# EAGLE board Thermostat (EAGLE 9.2.1)
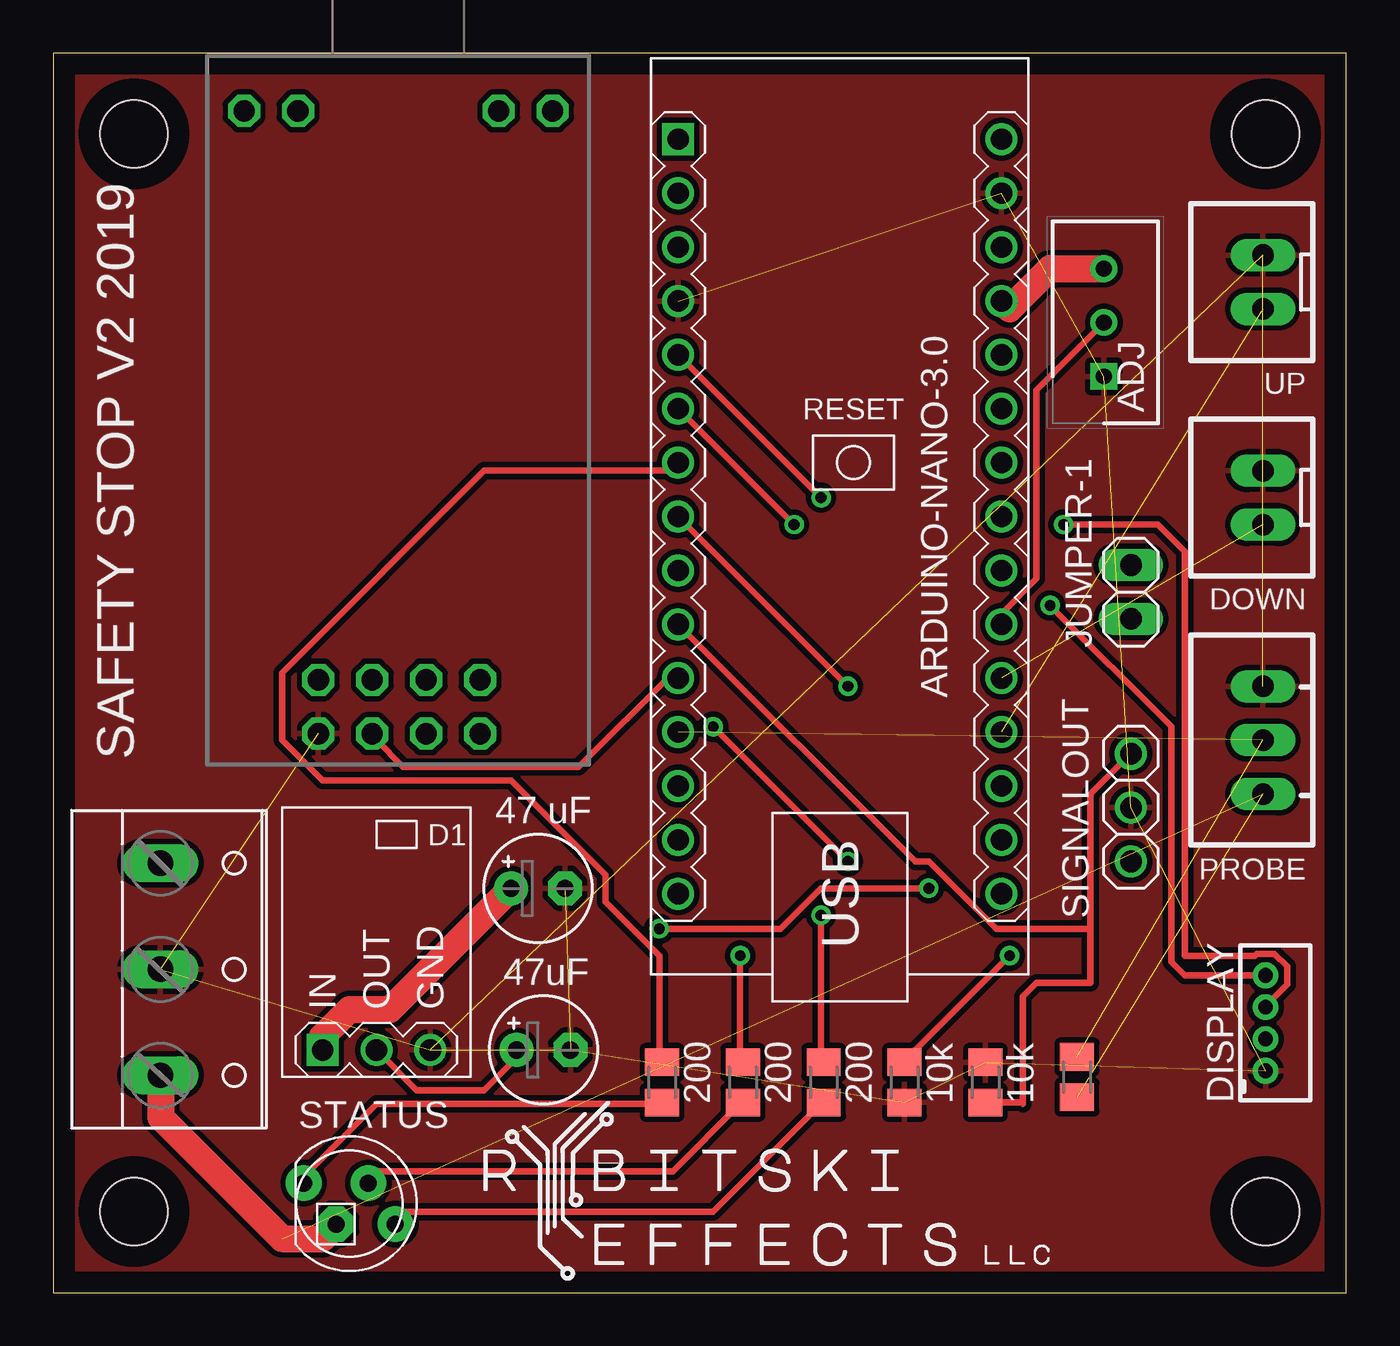
[diagram p0: board, top side]
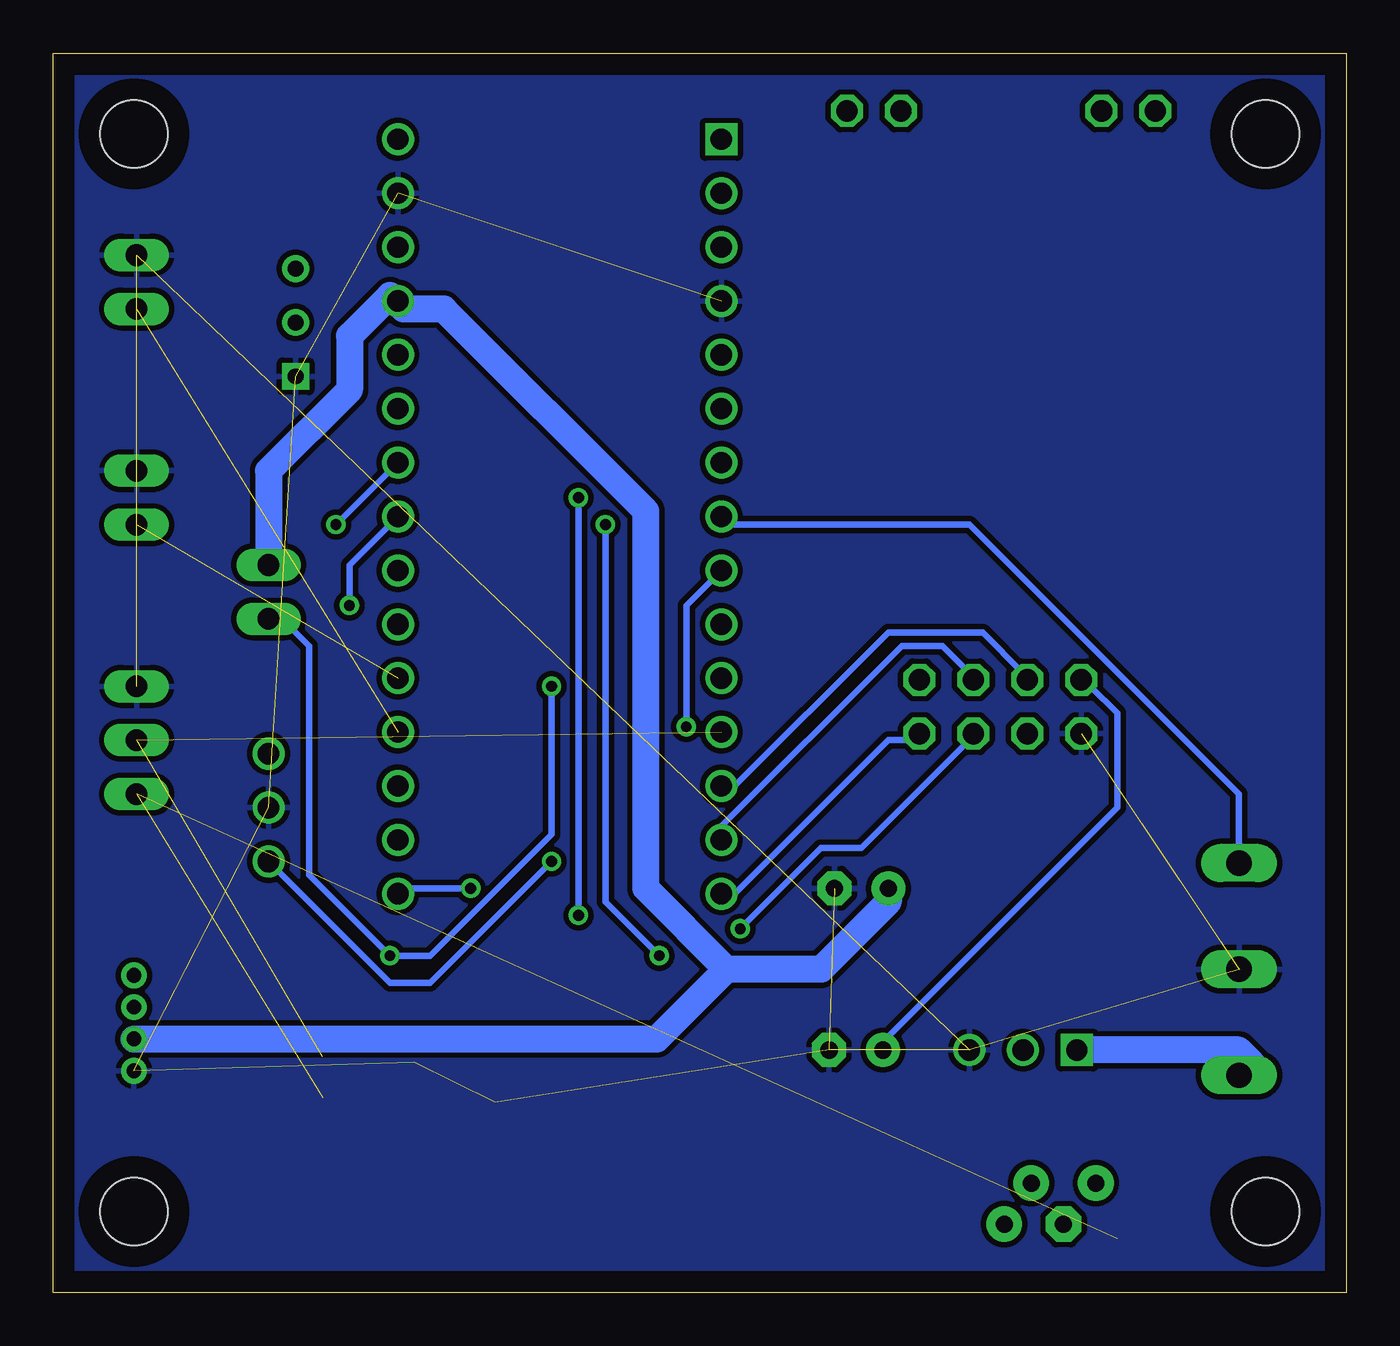
[diagram p1: board, bottom side, seen from below]

Size 60.96 x 58.42 mm. Coordinates in mm from the lower left corner, seen from the top.
Outline: 0,0 60.96,0 60.96,58.42 0,58.42 0,0
Copper layers (1*16): Top 0.035mm / dielectric 1.5mm / Bottom 0.035mm
Design rules "default": minimum track width 6mil, minimum drill 0.35mm, track to track 6mil, track to pad 6mil, pad to pad 6mil, via to via 6mil, smd to smd 6mil, copper to edge 40mil, drill to drill 6mil, minimum pad ring 10mil, minimum via ring 8mil, stop-mask expansion 4mil, vias tented up to drill 0mil, thermal gap 10mil
Net classes: 0 default: width 0.305 mm, drill 0.508 mm, clearance 0.254 mm; 1 Power: width 1.27 mm, drill 0.508 mm, clearance 0.381 mm
Holes 3.17 mm at 3.81,54.61 3.81,3.81 57.15,54.61 57.15,3.81

## Footprints (pad centres in the part's own frame; a part is rotated, then mirrored left to right if it is on the bottom)
SHDR3W54P0X254_1X3_953X483X115 = drill 0.75 pad 1.15 square: 1 0,0 | drill 0.75 pad 1.15: 2 -2.54,0; 3 -5.08,0
E2,5-5 = drill 0.813 pad 1.6: + -1.27,0 | drill 0.813 pad 1.6 octagon: - 1.27,0
B4B-ZR = drill 0.7 pad 1.1: 1 -2.25,0; 2 -0.75,0; 3 0.75,0; 4 2.25,0
JST-XH-02-PACKAGE-LONG-PAD = drill 1.016 long: 1 -1.27,0; 2 1.27,0
1X02 = drill 1.016 long: 1 -1.27,0; 2 1.27,0
ARDUINO-NANO-3.0 = drill 1 square: J1.1 17.78,7.62 | drill 1: J1.2 15.24,7.62; J1.3 12.7,7.62; J1.4 10.16,7.62; J1.5 7.62,7.62; J1.6 5.08,7.62; J1.7 2.54,7.62; J1.8 0,7.62; J1.9 -2.54,7.62; J1.10 -5.08,7.62; J1.11 -7.62,7.62; J1.12 -10.16,7.62; J1.13 -12.7,7.62; J1.14 -15.24,7.62; J1.15 -17.78,7.62; J2.1 17.78,-7.62; J2.2 15.24,-7.62; J2.3 12.7,-7.62; J2.4 10.16,-7.62; J2.5 7.62,-7.62; J2.6 5.08,-7.62; J2.7 2.54,-7.62; J2.8 0,-7.62; J2.9 -2.54,-7.62; J2.10 -5.08,-7.62; J2.11 -7.62,-7.62; J2.12 -10.16,-7.62; J2.13 -12.7,-7.62; J2.14 -15.24,-7.62; J2.15 -17.78,-7.62
JST-XH-03-PACKAGE-LONG-PAD = drill 1.016 long: 1 -2.54,0; 2 0,0; 3 2.54,0
M0805 = smd 1.3 x 1.6: 1 -0.95,0; 2 0.95,0
1X03 = drill 1.016: 1 -2.54,0; 2 0,0; 3 2.54,0
LED5MMRGB = drill 0.8 pad 1.676: 1 -2.159,0.968; 3 0.889,0.968; 4 2.159,-0.968 | drill 0.8 pad 1.676 octagon: 2 -0.635,-0.968
E01-ML01DP5 = drill 1 octagon: CE 10.23,-1.45; CSN 10.23,-3.99; GND 12.77,-1.45; IRQ 5.15,-3.99; MISO 5.15,-1.45; MOSI 7.69,-3.99; P$9 1.73,-30.8; P$10 4.27,-30.8; P$11 13.73,-30.8; P$12 16.27,-30.8; SCK 7.69,-1.45; VCC 12.77,-3.99
REG-AMS1117-3P = drill 1 square: 1 -2.54,-5.08 | drill 1: 2 0,-5.08; 3 2.54,-5.08
W237-103 = drill 1.194 long: 1 -5,-1.29; 2 0,-1.29; 3 5,-1.29

## Placement (x,y rotation side)
ADJ  3296W-1-103LF  [SHDR3W54P0X254_1X3_953X483X115]  49.53,43.18 270 top
C1  47 uF  [E2,5-5]  22.86,19.05 0 top
C2  47uF  [E2,5-5]  23.11,11.43 0 top
DISPLAY  B4B-ZR  [B4B-ZR]  57.15,12.7 90 top
DOWN  JST-XH-02-PIN-LONG-PAD  [JST-XH-02-PACKAGE-LONG-PAD]  57.02,37.47 90 top
JUMPER-1  [1X02]  50.8,33.02 90 top
M2  ARDUINO-NANO-3.0  [ARDUINO-NANO-3.0]  37.08,36.58 90 top
PROBE  JST-XH-03-PIN-LONG-PAD  [JST-XH-03-PACKAGE-LONG-PAD]  57.02,26.04 90 top
R1  200  [M0805]  36.32,9.91 90 top
R2  200  [M0805]  32.51,9.91 90 top
R3  200  [M0805]  28.7,9.91 90 top
R4  10k  [M0805]  40.13,9.91 90 top
R5  4.7K  [M0805]  48.26,10.16 90 top
R8  10k  [M0805]  43.94,9.91 90 top
SIGNALOUT  [1X03]  50.8,22.86 270 top
STATUS  RGBLED_CA-5MM  [LED5MMRGB]  13.97,4.19 0 top
U$1  E01-ML01DP5  [E01-ML01DP5]  25.27,24.89 180 top
U$2  REG-AMS1117-3P-3.3V  [REG-AMS1117-3P]  15.24,16.51 0 top
UP  JST-XH-02-PIN-LONG-PAD  [JST-XH-02-PACKAGE-LONG-PAD]  57.02,47.62 90 top
X1  [W237-103]  6.35,15.24 270 top

## Library data of the parts
ADJ = 3296W-1-103LF; DESCRIPTION: Bourns 3296W Series 25-Turn Through Hole Cermet Trimmer Resistor with Pin Terminations, 10000???? ????10% 1/2W ????100ppm/????C; HEIGHT: 11.55mm; MANUFACTURER_NAME: Bourns; MANUFACTURER_PART_NUMBER: 3296W-1-103LF; MOUSER_PART_NUMBER: 652-3296W-1-103LF; MOUSER_PRICE-STOCK: https://www.mouser.com/Search/Refine.aspx?Keyword=652-3296W-1-103LF
C1 C2 = rcl; SPICEPREFIX: C
DISPLAY = con-jst; MF: FARNELL; MPN: B4B-ZR(LF)(SN); OC_FARNELL: 1830916; OC_NEWARK: 37K9960
DOWN PROBE UP = Rembrandt Electronics - JST XH Connectors v1-0
JUMPER-1 = pinhead
M2 U$2 = diy-modules
R1-R5 R8 SIGNALOUT STATUS = adafruit
U$1 = MyLibrary
X1 = con-wago-500; MPN: 237-103; OC_FARNELL: unknown; OC_NEWARK: 18M7116

## Nets
3V3: M2.J2.14
+5V [Power]: ADJ.3 C1.+ DISPLAY.2 JUMPER-1.2 M2.J2.4 PROBE.1 R5.1 STATUS.2 U$2.1 X1.3
GND: ADJ.1 C1.- C2.- DISPLAY.1 DOWN.2 M2.J1.4 M2.J2.2 PROBE.3 R4.1 R8.2 SIGNALOUT.2 U$1.GND U$2.3 UP.2 X1.2
N$6: M2.J1.6 R2.2
N$7: C2.+ U$1.VCC U$2.2
N$8: R1.1 STATUS.4
N$9: R2.1 STATUS.3
N$10: R3.1 STATUS.1
N$11: M2.J1.5 R1.2
N$12: M2.J1.7 R3.2
N$13: ADJ.2 M2.J2.10
N-A0: M2.J2.12 UP.1
N-A1: DOWN.1 M2.J2.11
N-A4: DISPLAY.4 M2.J2.8
N-A5: DISPLAY.3 M2.J2.7
N-D5: JUMPER-1.1 M2.J1.8 R4.2 X1.1
N-D6: M2.J1.9 SIGNALOUT.3
N-D7: M2.J1.10 R8.1 SIGNALOUT.1
N-D8: M2.J1.11 U$1.CE
N-D9: M2.J1.12 PROBE.2 R5.2
N-D10: M2.J1.13 U$1.CSN
N-D11: M2.J1.14 U$1.MOSI
N-D12: M2.J1.15 U$1.MISO
N-D13: M2.J2.15 U$1.SCK
VIN: M2.J2.1

## Tracks (layer width: path | path; a pad name or v marks a point on that pad's centre or on a via)
+5V  (2 unrouted)
  Top 1.27: ADJ.3 46.99,48.26 45.09,46.35 M2.J2.4 | C1.+ 15.88,13.34 13.97,13.34 12.7,12.06 U$2.1 | STATUS.2 13.34,3.17 12.7,2.54 10.79,2.54 5.08,8.26 5.08,10.16 X1.3
  Bottom 1.27: JUMPER-1.2 50.8,38.73 46.99,42.55 46.99,45.09 45.09,46.99 M2.J2.4 44.45,46.35 42.55,46.35 33.02,36.83 33.02,19.05 29.21,15.24 | U$2.1 5.08,11.43 4.45,10.79 X1.3 | 29.21,15.24 24.77,15.24 21.59,18.41 C1.+ | DISPLAY.2 32.5,11.95 29.21,15.24
GND  (14 unrouted)
  pour Top: 0,59.69 0,0 1.27,-1.27 63.5,-1.27 64.77,0 64.77,58.42 1.27,58.42
  pour Bottom: -1.27,59.69 -1.27,1.27 1.27,-1.27 63.5,-1.27 63.5,59.69
N$6  (via drill 0.51)
  Top 0.305: v32.38,15.88 32.38,11.43 R2.2 | M2.J1.6 v34.92,36.2
  Bottom 0.305: v32.38,15.88 34.92,18.41 v34.92,36.2
N$7
  Top 0.305: U$2.2 17.14,9.53 20.32,9.53 22.23,11.43 C2.+
  Bottom 0.305: U$1.VCC 12.06,28.57 10.79,27.3 10.79,22.86 22.23,11.43 C2.+
N$8
  Top 0.305: R1.1 36.2,8.89 31.11,3.81 16.51,3.81 STATUS.4
N$9
  Top 0.305: R2.1 32.38,8.89 29.21,5.71 15.24,5.71 STATUS.3
N$10
  Top 0.305: R3.1 28.57,8.89 15.24,8.89 12.06,5.71 STATUS.1
N$11  (via drill 0.51)
  Top 0.305: v36.2,17.78 36.2,11.43 R1.2 | M2.J1.5 v36.2,37.47
  Bottom 0.305: v36.2,37.47 v36.2,17.78
N$12
  Top 0.305: R3.2 28.57,11.43 28.57,15.88 26.04,18.41 26.04,19.68 21.59,24.13 12.7,24.13 10.79,26.04 10.79,29.21 20.32,38.73 29.21,38.73 M2.J1.7
N$13
  Top 0.305: ADJ.2 46.35,42.55 46.35,33.66 44.45,31.75 M2.J2.10
N-A0  (1 unrouted)
N-A1  (1 unrouted)
N-A4  (via drill 0.51)
  Top 0.305: DISPLAY.4 53.34,14.95 52.7,15.59 52.7,26.67 v46.99,32.38
  Bottom 0.305: v46.99,32.38 46.99,34.29 M2.J2.8
N-A5  (via drill 0.51)
  Top 0.305: v47.62,36.2 52.07,36.2 53.34,34.92 53.34,15.88 56.65,15.88 56.73,15.96 57.57,15.96 58.16,15.37 58.16,14.53 57.15,13.52 DISPLAY.3
  Bottom 0.305: M2.J2.7 v47.62,36.2
N-D5  (via drill 0.51)
  Top 0.305: v45.09,15.88 40.64,11.43 R4.2 | M2.J1.8 v37.47,28.57
  Bottom 0.305: JUMPER-1.1 50.16,31.75 48.9,30.48 48.9,19.68 v45.09,15.88 43.18,15.88 37.47,21.59 v37.47,28.57 | M2.J1.8 29.21,36.2 17.78,36.2 5.08,23.5 5.08,20.32 X1.1
N-D6  (via drill 0.51)
  Top 0.305: v37.47,20.32 v31.11,26.67
  Bottom 0.305: M2.J1.9 31.11,32.38 v31.11,26.67 | v37.47,20.32 43.18,14.61 45.09,14.61 SIGNALOUT.3
N-D7
  Top 0.305: 48.9,17.14 48.9,23.5 SIGNALOUT.1 | 48.9,17.14 48.9,14.61 46.35,14.61 45.72,13.97 45.72,8.89 45.65,8.96 R8.1 | M2.J1.10 40.64,20.32 41.27,20.32 44.45,17.14 48.9,17.14
N-D8
  Top 0.305: U$1.CE 15.24,26.04 16.51,24.77 24.77,24.77 29.21,29.21 M2.J1.11
N-D9  (2 unrouted)
N-D10
  Bottom 0.305: U$1.CSN 15.24,29.21 17.14,31.11 21.59,31.11 29.21,23.5 M2.J1.13
N-D11
  Bottom 0.305: U$1.MOSI 17.78,29.21 19.05,30.48 20.95,30.48 29.84,21.59 M2.J1.14
N-D12
  Bottom 0.305: U$1.MISO 20.32,26.04 21.59,26.04 29.21,18.41 M2.J1.15
N-D13  (via drill 0.51)
  Top 0.305: v28.57,17.14 34.29,17.14 36.2,19.05 v41.27,19.05
  Bottom 0.305: v28.57,17.14 24.77,20.95 22.86,20.95 17.78,26.04 U$1.SCK | v41.27,19.05 44.45,19.05 M2.J2.15

## Text on the board
tNames: SAFETY STOP V2 2019